# Altium PCB PCB1.PcbDoc
Units mm, origin at the board's own origin, x right, y up, seen from the top; angles counter-clockwise.
Board outline 152.4 x 101.6 mm, 2 copper layers (Top Layer, Bottom Layer); 100 components, 81 nets, 378 pads, 30 vias.
Unrouted connection lines stored in the file: 247.
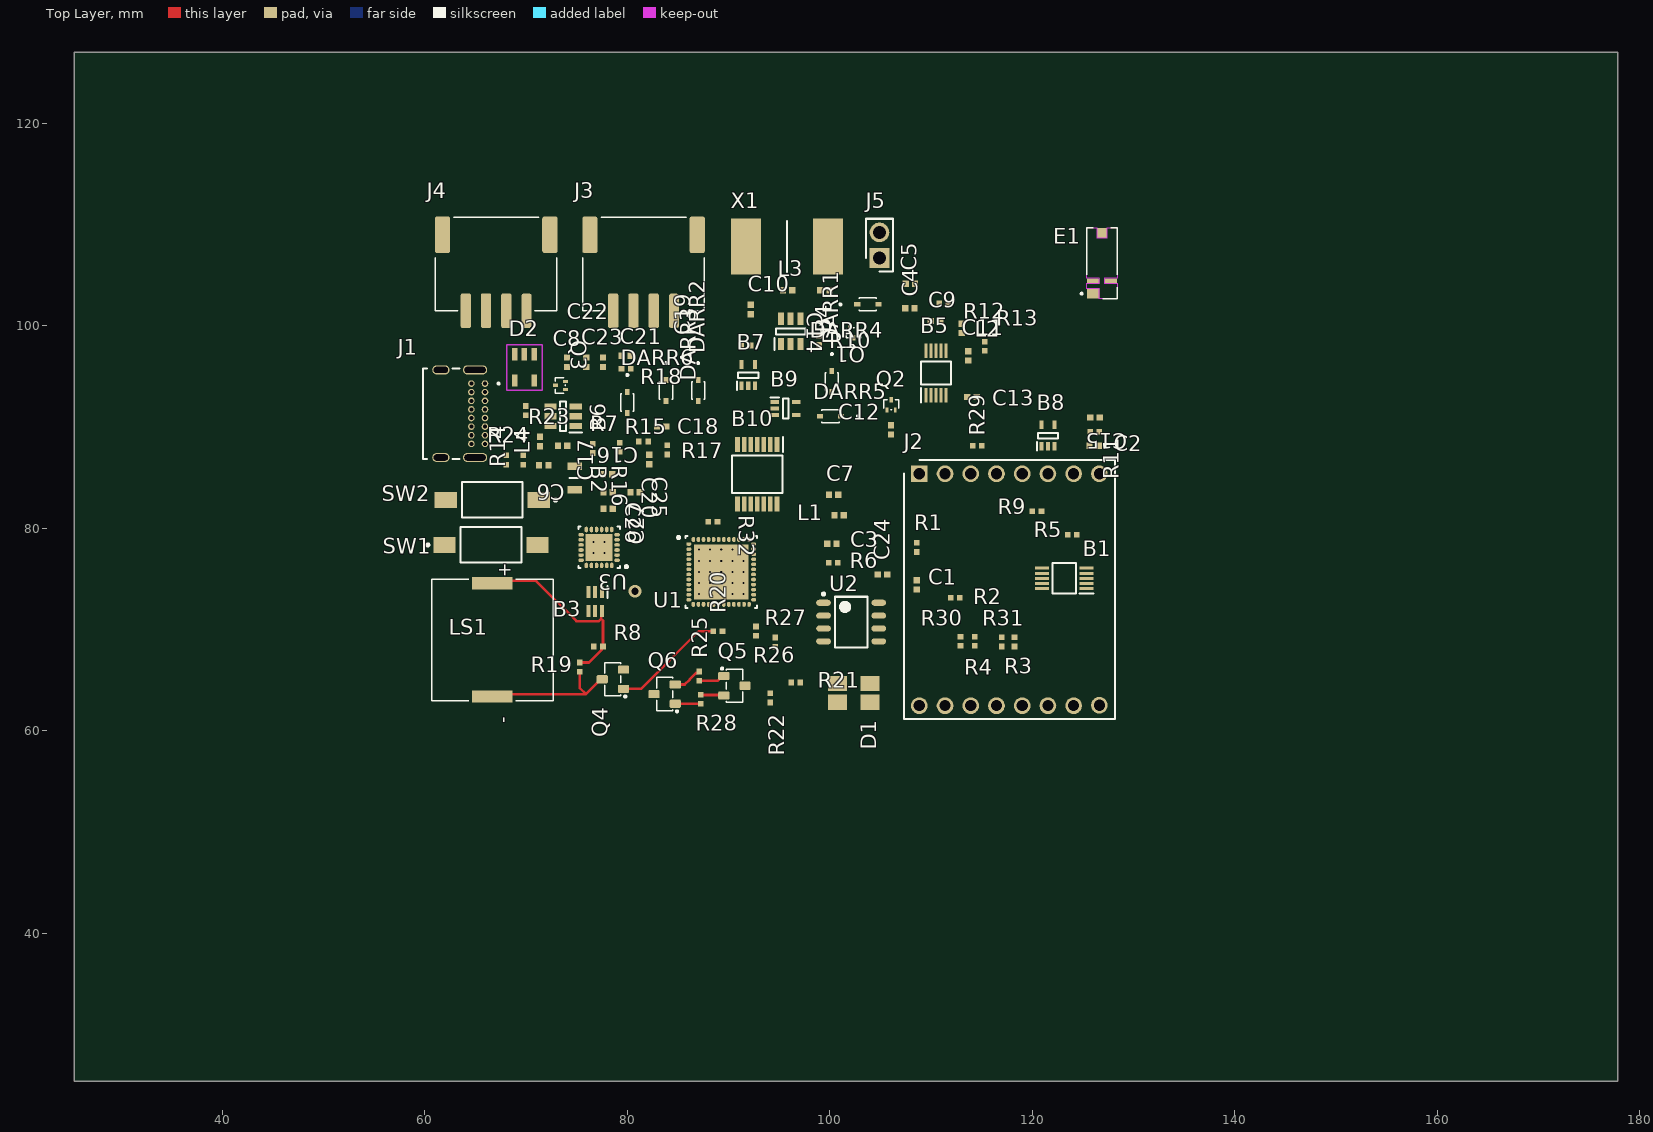
[diagram p0: Top Layer view]
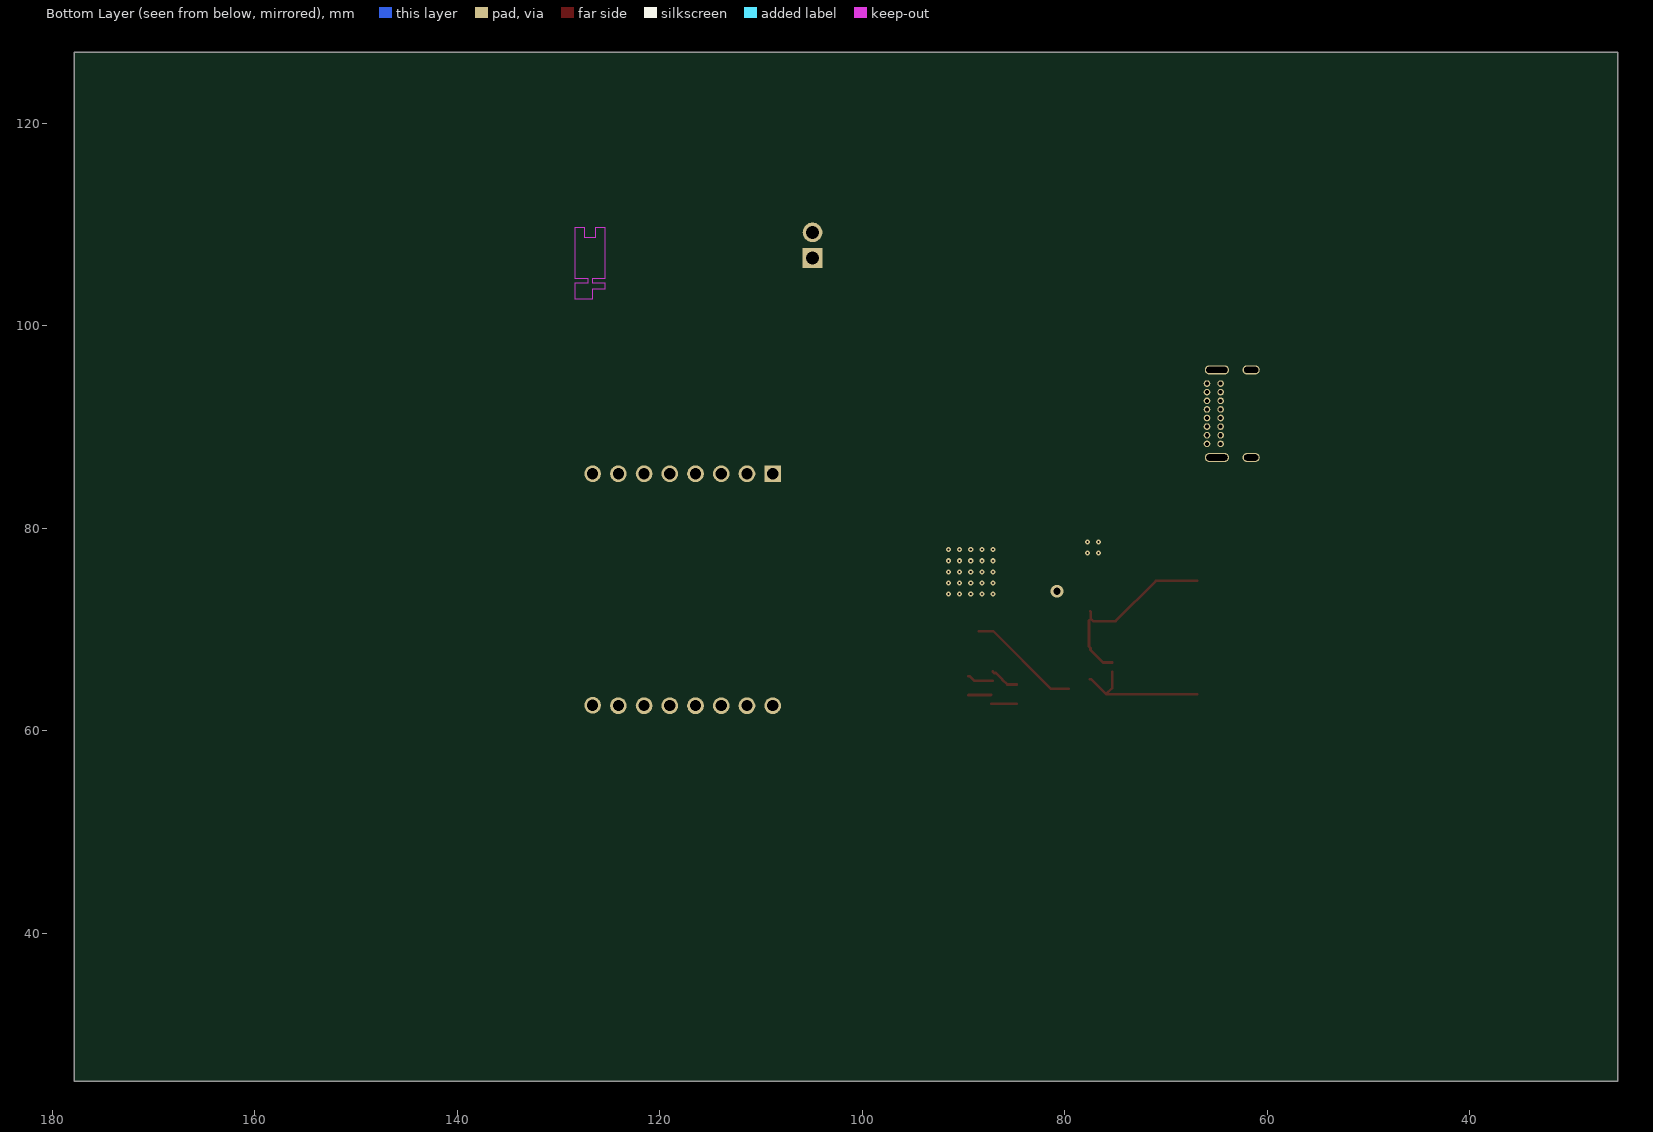
[diagram p1: Bottom Layer view, seen from below]

## Layer stack, top to bottom
Top Solder: solder mask 0.0102, Solder Resist, Dk 3.5
Top Layer: signal copper 0.0356
Dielectric 1: dielectric 0.32, FR-4, Dk 4.8
Bottom Layer: signal copper 0.0356
Bottom Solder: solder mask 0.0102, Solder Resist, Dk 3.5

## Board outline
25.4,25.4 177.8,25.4 177.8,127 25.4,127

## Design rules (kind name [scope] priority, off if disabled: settings)
Clearance [All] p1: gap=0.254 ignorepadtopadclearanceinfootprint=FALSE except(0: Arc-Hole Track-Hole SMDPad-Hole THPad-Hole Via-Hole Fill-Hole Poly-Hole Region-Hole Text-Hole)
PolygonConnect [All] p1: connectstyle=Relief reliefconductorwidth=0.254 reliefentries=4 polygonreliefangle="90 Angle" airgapwidth=0.254
RoutingVias [All] p1: holewidth=0.711 width=1.27 viastyle="Through Hole" minholewidth=0.711 minwidth=1.27 maxholewidth=0.711 maxwidth=1.27
SolderMaskExpansion [All] p1: expansion=0.102 istentingtop=FALSE
SupplyNets "Schematic Supply Nets_11" [InNet('3V3')] p1: voltage=0.000
SupplyNets "Schematic Supply Nets_10" [InNet('HT')] p2: voltage=0.000
SupplyNets "Schematic Supply Nets_9" [InNet('NOT_3V3_BT')] p3: voltage=0.000
SupplyNets "Schematic Supply Nets_8" [InNet('USB')] p4: voltage=0.000
SupplyNets "Schematic Supply Nets_7" [InNet('VDDA')] p5: voltage=0.000
SupplyNets "Schematic Supply Nets_6" [InNet('NOT_3V3_USB')] p6: voltage=0.000
SupplyNets "Schematic Supply Nets_5" [InNet('3V3_Logique')] p7: voltage=0.000
SupplyNets "Schematic Supply Nets_4" [InNet('3V3_BT')] p8: voltage=0.000
SupplyNets "Schematic Supply Nets_3" [InNet('BT')] p9: voltage=0.000
SupplyNets "Schematic Supply Nets_2" [InNet('3V3_HT')] p10: voltage=0.000
SupplyNets "Schematic Supply Nets_1" [InNet('GND')] p11: voltage=0.000
SupplyNets "Schematic Supply Nets" [InNet('3V3_USB')] p12: voltage=0.000
Width [All] p1: maxlimit=0.254 minlimit=0.254 preferedwidth=0.254
30 further rules are at their usual default settings.

## Classes and differential pairs
component class USB: C25 C26 C27 D2 J1 Q5 Q6 R23 R24 R25 R26 R27 R28 U3
component class Logique_Prio_Alim: B7 B8 B9 B10 DARR4 DARR5 DARR6 Q1 Q2 Q3
component class IHM: C21 D1 LS1 Q4 R18 R19 R20 R21 R22 SW1 SW2
component class I2C: B1 C1 C2 J2 J3 J4 J5 R1 R2 R3 R4 R5 R29 R30 R31 X1
component class ESP32_SRAM: C22 C23 C24 R32 U1 U2
component class Converti_Alim: B4 B5 C9 C10 C11 C12 C13 C14 C15 C16 C17 C18 C19 C20 DARR1 DARR2 DARR3 L2 L3 L4 R10 R11 R12 R13 R14 R15 R16 R17
component class Capteurs_et_Antenne: B2 B3 C3 C4 C5 C6 C7 C8 E1 L1 R6 R7 R8 R9

## Components (designator, comment, footprint, x,y, rotation, side; value= is the part's Value field where it differs from the comment)
B1 "INA237AIDGST" SOP50P490X110-10N 123.149,75.057 r180 top
B2 "NB12K00103JBB" RESC2212X50N 74.803,84.963 r270 top
B3 "TMP126DCKR" SOT65P210X110-6N 76.835,72.771 r270 top
B4 "LMR50410Y3FQDBVRQ1" SOT95P280X145-6N 96.139,99.441 r90 top
B5 "TPS62056DGSG4" SOP50P490X110-10N 110.49,95.336 r90 top
B6 "LMR50410Y3FQDBVRQ1" SOT95P280X145-6N 73.66,91.059 r180 top
B7 "MC74VHC1GT08DFT2G" SOT65P210X110-5N 91.948,95.123 r90 top
B8 "MC74VHC1GT08DFT2G" SOT65P210X110-5N 121.539,89.154 r90 top
B9 "MC74VHC1GT08DFT2G" SOT65P210X110-5N 95.631,91.821 r0 top
B10 "74VHC05FT" SOP65P640X120-14N 92.837,85.344 r270 top
C1 "100nF" CAPC1005X06N 108.585,74.422 r270 top
C2 "100nF" CAPC1005X06N 126.111,88.138 r0 top
C3 "8pF" CAPC1005X06N 100.203,78.486 r180 top
C4 "0.6pF" CAPC1005X06N 107.902,101.727 r180 top
C5 "0.9pF" CAPC1005X06N 107.95,104.14 r0 top
C6 "10nF" CAPC1005X06N 71.755,86.233 r180 top
C7 "1pF" CAPC1005X06N 100.378,83.312 r0 top
C8 "0.1µF" CAPC1005X06N 74.041,96.393 r90 top
C9 "10µF" CAPC1005X06N 110.442,100.457 r0 top
C10 "2.2µF" CAPC1005X06N 92.202,101.6 r270 top
C11 "22µF" CAPC1005X06N 113.665,97.028 r90 top
C12 "0.1µF" CAPC1005X06N 106.045,89.71 r90 top
C13 "0.01F" CAPC1005X06N 114.046,92.964 r0 top
C14 "0.01F" CAPC1005X06N 99.52,103.505 r0 top
C15 "10µF" CAPC1005X06N 126.19,90.932 r0 top
C16 "2.2µF" CAPC1005X06N 78.057,85.344 r0 top
C17 "0.1µF" CAPC1005X06N 73.612,88.138 r180 top
C18 "0.01F" CAPC1005X06N 83.391,90.043 r0 top
C19 "10µF" CAPC1005X06N 91.694,98.044 r0 top
C20 "10µF" CAPC1005X06N 82.169,86.789 r270 top
C21 "1µF" CAPC1005X06N 79.883,97.028 r180 top
C22 "10µF" CAPC1005X06N 75.946,96.393 r90 top
C23 "100nF" CAPC1005X06N 77.597,96.393 r90 top
C24 "100nF" CAPC1005X06N 105.204,75.438 r0 top
C25 "100nF" CAPC1005X06N 78.105,83.566 r0 top
C26 "22µF" CAPC1005X06N 78.105,81.915 r0 top
C27 "4.7µF" CAPC1005X06N 80.772,83.566 r0 top
D1 "598-8610-207F" 5988610207F 102.362,63.754 r0 top
D2 "824011" 824011 69.85,95.885 r180 top
DARR1 "SD103AWS-7-F" SD103AWS-7-F 100.203,94.488 r270 top
DARR2 "SD103AWS-7-F" SD103AWS-7-F 86.995,93.599 r270 top
DARR3 "SD103AWS-7-F" SD103AWS-7-F 83.82,93.599 r270 top
DARR4 "SD103AWS-7-F" SD103AWS-7-F 103.759,102.108 r0 top
DARR5 "SD103AWS-7-F" SD103AWS-7-F 100.076,91.059 r180 top
DARR6 "SD103AWS-7-F" SD103AWS-7-F 80.01,92.422 r270 top
E1 "NN03-320" XCVR_NN03-320 126.873,106.172 r270 top
J1 "Use" USB4085-GF-A 61.595,91.313 r270 top
J2 "825433-8" Connect-Mikrobus 108.839,85.384 r0 top
J3 "114020164" 114020164 81.613,105.273 r180 top
J4 "114020164" 114020164 67.056,105.283 r180 top
J5 "61300211121" 61300211121 104.902,106.68 r90 top
L1 "12nH" LQPC1005X06N 103.711,84.074 r0 top
L2 "10µH" LQPC1005X06N 115.824,96.949 r270 top
L3 "3.3µH" LQPC1005X06N 98.631,106.299 r0 top
L4 "3.3µH" LQPC1005X06N 68.58,91.361 r90 top
LS1 "PKLCS1212E40A1-R1" SPKR_PKLCS1212E40A1-R1 66.675,68.973 r270 top
Q1 "SI3139K-TP" SI3139K-TP 102.362,99.314 r180 top
Q2 "SI3139K-TP" SI3139K-TP 106.064,92.194 r0 top
Q3 "SI3139K-TP" SI3139K-TP 73.398,94.107 r90 top
Q4 "SS8050-G" SS8050-G 78.579,65.09 r90 top
Q5 "SS8050-G" SS8050-G 90.585,64.45 r270 top
Q6 "SS8050-G" SS8050-G 83.693,63.627 r90 top
R1 "10Ω" RESC1005X06N 108.585,78.105 r90 top
R2 "10Ω" RESC1005X06N 112.395,73.152 r0 top
R3 "4.7kΩ" RESC1005X06N 118.237,68.776 r270 top
R4 "4.7kΩ" RESC1005X06N 114.3,68.845 r270 top
R5 "10kΩ" RESC1005X06N 123.952,79.375 r180 top
R6 "30Ω" RESC1005X06N 100.33,76.581 r0 top
R7 "10kΩ" RESC1005X06N 76.581,87.884 r270 top
R8 "10kΩ" RESC1005X06N 77.158,68.326 r0 top
R9 "10kΩ" RESC1005X06N 120.454,81.661 r0 top
R10 "51kΩ" RESC1005X06N 98.933,98.552 r270 top
R11 "22.1kΩ" RESC1005X06N 126.169,89.535 r180 top
R12 "1kΩ" RESC1005X06N 111.252,102.235 r0 top
R13 "1kΩ" RESC1005X06N 115.316,97.986 r90 top
R14 "100k" RESC1005X06N 69.977,91.625 r90 top
R15 "51kΩ" RESC1005X06N 81.603,88.567 r180 top
R16 "22.1kΩ" RESC1005X06N 79.248,88.001 r90 top
R17 "1kΩ" RESC1005X06N 83.947,87.736 r90 top
R18 "10kΩ" RESC1005X06N 79.883,95.758 r180 top
R19 "1kΩ" RESC1005X06N 75.311,66.294 r90 top
R20 "1kΩ" RESC1005X06N 88.958,69.85 r180 top
R21 "330Ω" RESC1005X06N 96.647,64.77 r0 top
R22 "330Ω" RESC1005X06N 94.107,63.246 r270 top
R23 "5.1kΩ" RESC1005X06N 69.723,86.741 r90 top
R24 "5.1kΩ" RESC1005X06N 68.072,86.741 r90 top
R25 "12kΩ" RESC1005X06N 87.122,65.405 r90 top
R26 "470Ω" RESC1005X06N 92.71,69.85 r270 top
R27 "470Ω" RESC1005X06N 94.615,68.765 r270 top
R28 "12kΩ" RESC1005X06N 87.249,63.119 r90 top
R29 "100kΩ" RESC1005X06N 114.554,88.138 r0 top
R30 "2kΩ" RESC1005X06N 112.903,68.834 r270 top
R31 "2kΩ" RESC1005X06N 116.967,68.776 r270 top
R32 "0Ω" RESC1005X06N 88.461,80.645 r0 top
SW1 "FSMSM" TECO-FSMSM-2_V 66.548,78.359 r0 top
SW2 "FSMSM" TECO-FSMSM-2_V 66.675,82.804 r180 top
U1 "ESP32-PICO-D4" PQFN50P700X700X104_HS-49N 89.281,75.692 r0 top
U2 "IS66WVS1M8BLL-104NLI" SOIC127P600X175-8N 102.108,70.739 r0 top
U3 "CP2104-F03-GM" PQFN50P400X400X80_HS-25N 77.216,78.105 r180 top
X1 "PSR400ITQFF0L50" RESC10052X200N 95.758,107.823 r180 top

## Footprints (in the part's own frame and the unit in brackets; to place one, negate y for a bottom-side part, rotate by r counter-clockwise, add the part's x,y. Pads: shape width x height; smd on the part's side, far side on the other; paste and mask are expansions set on the pad)
824011 [mil] "Suppresseurs ESD / diodes TVS WE-TVS High Speed 5uA 5VDC 2+1"
  rect 21.65x47.24 smd: 1(-37.4,-51.18) 2(0,-51.18) 3(37.4,-51.18) 4(37.4,51.18) 5(-37.5,51)
  Top Layer keep-out lines w5: 68.9,88.58 68.9,-88.58 -68.9,-88.58 -68.9,88.58 68.9,88.58
  body extent -57,-55 57,55, height 57
114020164 [mm]
  rrect50% 1x3.4 smd: 1(-3,3.8)
  rrect30% 1x3.4 smd: 2(-1,3.8) 3(1,3.8) 4(3,3.8)
  rrect26% 1.5x3.6 smd: MP1(-5.3,-3.7) MP2(5.3,-3.7)
  silkscreen extent -6,-5.45 6,3.8, body extent -6.1,-5.59 5.9,4.59, height 5.2
5988610207F [mm]
  rect 1.9x1.5 smd: 1(-1.6,0.925) 2(1.6,0.925) 3(-1.6,-0.925) 4(1.6,-0.925)
  silkscreen extent -1.65,2 -1.55,2.1, body extent -1.6,-1.35 1.6,1.35, height 0.9
61300211121 [mm] "Embases et logements de câbles WR-PHD 2.54mm 2Pin T HT Header"
  rect 1.95x1.95 / inner round 1.95 / far side rect 1.95x1.95 hole 1.3: 1(0,0)
  round 1.95 hole 1.3: 2(2.54,0)
  silkscreen extent -1.35,-1.35 3.89,1.35
CAPC1005X06N [mm] "Chip Capacitor, 2-Leads, Body 1,00x0,50mm, IPC Medium Density"
  rect 0.62x0.62 smd: 1(-0.46,0) 2(0.46,0)
  body extent -0.53,-0.28 0.53,0.28, height 0.55
Connect-Mikrobus [mm]
  rect 1.65x1.65 / inner round 1.65 / far side rect 1.65x1.65 hole 1.1: 1(0,0)
  round 1.65 hole 1.1: 2(2.54,0) 3(5.08,0) 4(7.62,0) 5(10.16,0) 6(12.7,0) 7(15.24,0) 8(17.78,0) 9(17.78,-22.86) 10(15.24,-22.9) 11(12.7,-22.9) 12(10.16,-22.9) 13(7.62,-22.9) 14(5.08,-22.9) 15(2.54,-22.9) 16(0,-22.9)
  silkscreen extent -1.52,-24.22 19.3,1.37, body extent -1.37,-24.18 19.14,1.28, height 6.7
LQPC1005X06N [mm]
  rect 0.62x0.62 smd: 1(-3.254,-2.794) 2(-2.334,-2.794)
  body extent -3.32,-3.07 -2.27,-2.52, height 0.55
PQFN50P400X400X80_HS-25N [mm] "PQFN, 24-Leads, Body 4,00x4,00mm, Pitch 0,50mm, Thermal Pad 2,65x2,65mm, IPC Medium Density"
  oval 0.55x0.35 smd: 1(-1.775,1.25) 2(-1.775,0.75) 3(-1.775,0.25) 4(-1.775,-0.25) 5(-1.775,-0.75) 6(-1.775,-1.25) 13(1.775,-1.25) 14(1.775,-0.75) 15(1.775,-0.25) 16(1.775,0.25) 17(1.775,0.75) 18(1.775,1.25)
  oval 0.35x0.55 smd: 7(-1.25,-1.775) 8(-0.75,-1.775) 9(-0.25,-1.775) 10(0.25,-1.775) 11(0.75,-1.775) 12(1.25,-1.775) 19(1.25,1.775) 20(0.75,1.775) 21(0.25,1.775) 22(-0.25,1.775) 23(-0.75,1.775) 24(-1.25,1.775)
  rect 2.65x2.65 smd: 25(0,0)
  silkscreen extent -2.83,-2.05 2.05,2.05, body extent -2.05,-2.05 2.05,2.05, height 0.8
PQFN50P700X700X104_HS-49N [mm] "PQFN, 48-Leads, Body 7,00x7,00mm, Pitch 0,50mm, Thermal Pad 5,40x5,40mm, IPC Medium Density"
  oval 0.5x0.35 smd: 1(-3.2,2.75) 2(-3.2,2.25) 3(-3.2,1.75) 4(-3.2,1.25) 5(-3.2,0.75) 6(-3.2,0.25) 7(-3.2,-0.25) 8(-3.2,-0.75) 9(-3.2,-1.25) 10(-3.2,-1.75) 11(-3.2,-2.25) 12(-3.2,-2.75) 25(3.2,-2.75) 26(3.2,-2.25) 27(3.2,-1.75) 28(3.2,-1.25) 29(3.2,-0.75) 30(3.2,-0.25) 31(3.2,0.25) 32(3.2,0.75) 33(3.2,1.25) 34(3.2,1.75) 35(3.2,2.25) 36(3.2,2.75)
  oval 0.35x0.5 smd: 13(-2.75,-3.2) 14(-2.25,-3.2) 15(-1.75,-3.2) 16(-1.25,-3.2) 17(-0.75,-3.2) 18(-0.25,-3.2) 19(0.25,-3.2) 20(0.75,-3.2) 21(1.25,-3.2) 22(1.75,-3.2) 23(2.25,-3.2) 24(2.75,-3.2) 37(2.75,3.2) 38(2.25,3.2) 39(1.75,3.2) 40(1.25,3.2) 41(0.75,3.2) 42(0.25,3.2) 43(-0.25,3.2) 44(-0.75,3.2) 45(-1.25,3.2) 46(-1.75,3.2) 47(-2.25,3.2) 48(-2.75,3.2)
  rect 5.4x5.4 smd: 49(0,0)
  silkscreen extent -4.32,-3.55 3.55,3.55, body extent -3.55,-3.55 3.55,3.55, height 1.04
RESC1005X06N [mm] "Chip Resistor, 2-Leads, Body 1,00x0,50mm, IPC Medium Density"
  rect 0.55x0.55 smd: 1(-0.45,0) 2(0.45,0)
  body extent -0.53,-0.28 0.53,0.28, height 0.55
RESC2212X50N [mm]
  rect 0.75x1.45 smd: 1(-1.15,0) 2(1.15,0)
  silkscreen extent 0,-0.53 0,0.53, body extent -1.07,-0.63 1.07,0.63, height 0.5
RESC10052X200N [mm]
  rect 2.95x5.5 smd: 1(-4.05,0) 2(4.05,0)
  silkscreen extent 0,-2.5 0,2.5, body extent -5,-2.6 5,2.6, height 2
SD103AWS-7-F [mm]
  rect 0.6x0.46 smd: 1(-1.05,0) 2(1.05,0)
  silkscreen extent -2.81,-0.65 0.85,0.65, body extent -1.25,-0.65 1.25,0.65, height 1.2
SI3139K-TP [mm] "MOSFET P-Channel MOSFET"
  rect 0.28x0.5 smd paste+0 mask+0.075: 1(-0.4,-0.5) 2(0.4,-0.5)
  rect 0.36x0.5 smd paste+0 mask+0.075: 3(0,0.5)
  silkscreen extent -0.75,-0.5 0.75,0.5, body extent -0.6,-0.6 0.6,0.6, height 0.55
SOIC127P600X175-8N [mm] "SOIC, 8-Leads, Body 4,90x3,90mm, Pitch 1,27mm, IPC Medium Density"
  oval 1.45x0.6 smd: 1(-2.725,1.905) 2(-2.725,0.635) 3(-2.725,-0.635) 4(-2.725,-1.905) 5(2.725,-1.905) 6(2.725,-0.635) 7(2.725,0.635) 8(2.725,1.905)
  silkscreen extent -2.85,-2.5 1.6,2.88, body extent -3,-2.5 3,2.5, height 1.75
SOP50P490X110-10N [mm]
  rect 1.4x0.3 smd: 1(-2.2,1) 2(-2.2,0.5) 3(-2.2,0) 4(-2.2,-0.5) 5(-2.2,-1) 6(2.2,-1) 7(2.2,-0.5) 8(2.2,0) 9(2.2,0.5) 10(2.2,1)
  silkscreen extent -2.9,-1.5 1.15,1.5, body extent -2.46,-1.5 2.46,1.5, height 1.06
SOP65P640X120-14N [mm]
  rect 1.475x0.45 smd: 1(-2.938,1.95) 2(-2.938,1.3) 3(-2.938,0.65) 4(-2.938,0) 5(-2.938,-0.65) 6(-2.938,-1.3) 7(-2.938,-1.95) 8(2.938,-1.95) 9(2.938,-1.3) 10(2.938,-0.65) 11(2.938,0) 12(2.938,0.65) 13(2.938,1.3) 14(2.938,1.95)
  silkscreen extent -3.67,-2.5 1.85,2.52, body extent -3.1,-2.75 3.3,2.75, height 1.1
SOT65P210X110-5N [mm]
  rect 0.85x0.4 smd: 1(-1.05,0.65) 2(-1.05,0) 3(-1.05,-0.65) 4(1.05,-0.65) 5(1.05,0.65)
  silkscreen extent -1.48,-1 0.28,1.1, body extent -0.95,-1 1.15,1, height 1.1
SOT65P210X110-6N [mm]
  rect 1.2x0.4 smd: 1(-0.95,0.65) 2(-0.95,0) 3(-0.95,-0.65) 4(0.95,-0.65) 5(0.95,0) 6(0.95,0.65)
  silkscreen extent -1.55,1.2 -0.35,1.2, body extent -1.05,-1 1.05,1, height 1
SOT95P280X145-6N [mm]
  rect 1.2x0.6 smd: 1(-1.25,0.95) 2(-1.25,0) 3(-1.25,-0.95) 4(1.25,-0.95) 5(1.25,0) 6(1.25,0.95)
  silkscreen extent -1.85,-1.45 0.3,1.6, body extent -1.4,-1.45 1.4,1.45, height 1.2
SPKR_PKLCS1212E40A1-R1 [mm]
  rect 1.2x4 smd: N(5.6,0) P(-5.6,0)
  silkscreen extent -6,-6 6,6, body extent -6,-6 6,6, height 3
SS8050-G [mm]
  rrect25% 0.8x1.1 smd paste+0 mask+0.075: 1(-0.95,-1.05) 2(0.95,-1.05) 3(0,1.05)
  silkscreen extent -1.77,-1.3 1.65,0.8, body extent -1.5,-1.3 1.5,1.3, height 1.1
TECO-FSMSM-2_V [mm] "SMD, 2-Leads, Body 6x3.5mm, Pitch 9.19mm"
  rect 2.2x1.6 smd: 1(-4.595,0)
  rect 2.18x1.6 smd: 2(4.595,0)
  silkscreen extent -6.37,-1.75 3,1.75, body extent -4.98,-1.75 4.98,1.75, height 4.4
USB4085-GF-A [mm]
  round 0.65 hole 0.4: A1(-2.975,4.36) A4(-2.125,4.36) A5(-1.275,4.36) A6(-0.425,4.36) A7(0.425,4.36) A8(1.275,4.36) A9(2.125,4.36) A12(2.975,4.36) B1(2.975,3.01) B4(2.125,3.01) B5(1.275,3.01) B6(0.425,3.01) B7(-0.425,3.01) B8(-1.275,3.01) B9(-2.125,3.01) B12(-2.975,3.01)
  oval 0.9x1.7 hole 0.6 slot 1.4 at 90 deg: S1(-4.325,0) S2(4.325,0)
  oval 0.9x2.4 hole 0.6 slot 2.1 at 90 deg: S3(-4.325,3.38) S4(4.325,3.38)
  silkscreen extent -4.47,-1.74 4.47,5.8, body extent -4.47,-4.25 4.47,4.92, height 3.46
XCVR_NN03-320 [mm]
  rect 1x1 smd: 1(-3,0)
  rect 0.5x1.25 smd: 2(1.75,-0.875) 4(1.75,0.875)
  rect 1x1.25 smd: 3(3,-0.875)
  Keep-Out Layer region: 3.5,-0.25 2.5,-0.25 2.5,-1.5 2,-1.5 2,-0.25 1.5,-0.25 1.5,-1.5 -3.5,-1.5 -3.5,-0.5 -2.5,-0.5 -2.5,0.5 -3.5,0.5 -3.5,1.5 1.5,1.5 1.5,0.25 2,0.25 2,1.5 3.5,1.5
  silkscreen extent -3.5,-2.1 3.5,1.5, body extent -3.5,-1.5 3.5,1.5, height 2.02

## Part data
B1: "Current Sense Amplifiers 85-V, 16-bit, I2C output current/voltage/power monitor with alert 10-VSSOP -40 to 125", Manufacturer_Name="Texas Instruments", Mouser Part Number=595-INA237AIDGST, Manufacturer_Part_Number=INA237AIDGST
B2: "CTN Capteur - NTC SMD Thermistor, NB12K, 10K, 5% AVX 10k 0805 Protection NTC Thermistor, 5s, 2 x 1.25 x 1.3mm", Manufacturer_Name="Kyocera AVX", Mouser Part Number=581-NB12K00103JBB, Arrow Part Number=NB12K00103JBB, Arrow Price/Stock=https://www.arrow.com/en/products/nb12k00103jbb/avx, Datasheet Link=https://datasheet.datasheetarchive.com/originals/distributors/Datasheets-DGA6/551314.pdf, Geometry.Height=0.5mm, Manufacturer_Part_Number=NB12K00103JBB, Mouser Price/Stock=https://www.mouser.co.uk/ProductDetail/AVX/NB12K00103JBB/?qs=4%252B6%252BTdINQeDPvI%252BQUQjJ3Q%3D%3D
B3: "Board Mount Temperature Sensors +/-0.25 C SPI temperature sensor with 175 C operation, CRC and slew-rate alert", Manufacturer_Name="Texas Instruments", Mouser Part Number=595-TMP126DCKR, Manufacturer_Part_Number=TMP126DCKR
B4 B6: "Régulateurs de tension de commutation Automotive qualified SIMPLE SWITCHER 4-V to 36-V, 1-A synchronous step-down converter 6-SOT-23 -40 to 150", Manufacturer_Name="Texas Instruments", Mouser Part Number=595-R50410Y3FQDBVRQ1, Manufacturer_Part_Number=LMR50410Y3FQDBVRQ1
B5: "TEXAS INSTRUMENTS - TPS62056DGSG4 - Synchronous Buck (Step Down) Switching Regulator, Fixed, 2.7V-10Vin, 3.3V/0.8A out, 850kHz, VSSOP-10", Manufacturer_Name="Texas Instruments", Mouser Part Number=595-TPS62056DGSG4, Manufacturer_Part_Number=TPS62056DGSG4
B7 B8 B9: "Single 2-Input AND Gate, TTL Level", Manufacturer_Name=onsemi, Manufacturer_Part_Number=MC74VHC1GT08DFT2G
B10: "Logic Gates CMOS LOGIC IC INVERTER", Manufacturer_Name=Toshiba, Mouser Part Number=757-74VHC05FT, Manufacturer_Part_Number=74VHC05FT
C1 C2 C3 C4 C5 C6 C7 C8 C9 C10 C11 C12 C13 C14 C15 C16 C17 C18 C19 C20 C21 C22 C23 C24 C25 C26 C27: library part Capacitor
D1: "Standard LEDs - SMD Red/Green WC 80/50mcd 645/570nm", Manufacturer_Name=Dialight, Mouser Part Number=645-598-8610-207F, Arrow Part Number=598-8610-207F, Arrow Price/Stock=https://www.arrow.com/en/products/598-8610-207f/dialight?region=nac, Datasheet Link=https://media.digikey.com/pdf/Data%20Sheets/Dialight%20PDFs/598%20Series%201210%20Pkg%20Bi-Color.pdf, Geometry.Height=0.8mm, Manufacturer_Part_Number=598-8610-207F, Mouser Price/Stock=https://www.mouser.co.uk/ProductDetail/Dialight/598-8610-207F?qs=7JStj%2FjQ2SFuCjosqwklHQ%3D%3D
D2: "TVS Diode Array WE-TVS, High Speed Series  - Low capazity - No leakage current - Low clamping voltage - high ESD voltage protection  -- USB 1.0 - 2.0"
DARR1 DARR2 DARR3 DARR4 DARR5 DARR6: "Diode Array 3 Independent Schottky 40V 175mA Surface Mount 6-TSSOP, SC-88, SOT-363"
E1: "Dual port antenna booster for GNSS, Bluetooth, 5G and UWB (1561 - 1606MHz, 2400 - 2500MHz, 3400 - 3800MHz, 3100 - 4800MHz and 6000 - 10600 MHz), signal booster", Manufacturer_Name=Ignion, Mouser Part Number=128-NN03-320, Manufacturer_Part_Number=NN03-320
J1: library part USB4085-GF-A, "Connecteurs USB USB Type C, 2.0, Rec, TH , G/F, RA , Top Mnt, T & R"
J2: library part Connect-Mikrobus, "Headers & Wire Housings 8P double for connection mikrobus", Manufacturer_Name="TE Connectivity", Mouser Part Number=571-825433-8, Manufacturer_Part_Number=825433-8
J3 J4: "Seeed Studio Accessories Grove Female Header - SMD-4P-2.0mm-90D-20Pcs", Manufacturer_Name="Seeed Studio", Mouser Part Number=713-114020164, Manufacturer_Part_Number=114020164
J5: "WURTH ELEKTRONIK - 61300211121 - HEADER, 2.54MM, PIN, THT, VERTICAL, 2WAY"
L1 L2 L3 L4: library part Bobine
LS1: "Buzzers Transducer, Externally Driven Piezo 1.5V 2kHz 70dB @ 1.5V, 10cm Surface Mount Solder Pads", Package=None, Availability=Unavailable, MF="Murata Electronics", MP=PKLCS1212E40A1-R1, Price=None
Q1 Q2 Q3: "MOSFET P-Channel MOSFET"
Q4 Q5 Q6: "Bipolar Transistors - BJT NPN TRANSISTOR 1.5A 40V"
R1 R2 R3 R4 R5 R6 R7 R8 R9 R10 R11 R12 R13 R14 R15 R16 R17 R18 R19 R20 R21 R22 R23 R24 R25 R26 R27 R28 R29 R30 R31 R32: library part Resistor
SW1 SW2: library part CMP-2000-07511-1, "FSMSM Push Button Switch, 50 mA, -35 to 85 degC, 2-Pin SMD, RoHS, Bulk", Case\/Package=SMD/SMT, Contact Current Rating=50mA, Contact Resistance=100mOhm, Manufacturer="TE Connectivity", Max Operating Temperature=85degC, Max Voltage Rating (DC)=12V, Min Operating Temperature=-35degC, Operating Force=180gf, Package Description="2-Pin Surface Mount Device, Body 6 x 3.5 mm, Pitch 9.19 mm", Package Quantity=1000, Voltage Rating (DC)=24V, Actuator Length=1.07mm, Actuator Material=Polyamide, Contact Material=Brass, Contact Plating=Silver, Current Rating=50mA, Datasheet URL=http://www.te.com/commerce/DocumentDelivery/DDEController?Action=showdoc&DocId=Customer+Drawing%7F1437566-3%7FC2%7Fpdf%7FEnglish%7FENG_CD_1437566-3_C2_1437566_3_1_c.dwg.pdf%7F1437566-3, Datasheet Version="Rev. C2, 08/2014", Electrical Life=20000Cycles, ELV=Compliant, Illumination Type=Illuminated, Lead Free=LeadFree, Manufacturer URL=http://www.te.com/, Mechanical Life=20000Cycles, Mount=SurfaceMount, Mounting Technology=SurfaceMount, Orientation=Straight, Package Reference=FSMSM, Packaging=LoosePiece, REACH SVHC=Unknown, RoHSCompliant=true, Switch Travel=0.25mm, Termination=GullWing, Throw Configuration=SPST
U1: library part ESP32, "Système RF sur puce - SoC SIP module ESP32 with 4MByte Flash, Dual Core MCU, Wi-Fi & Bluetooth Combo, LGA48-pin, 7*7mm", Manufacturer 1="Espressif Systems", Supplier Part Number 1=1904-1029-1-ND, Manufacturer Part Number 1=ESP32-PICO-D4, Supplier 1=Digi-Key
U2: library part SRAM, "SRAM 8Mb, SerialRAM, 2.7V-3.6V, 104MHz, 8 pin SOIC 150 mil, RoHS", Manufacturer 1=ISSI, Supplier Part Number 1=706-IS66WVS1M8BLL-104NLI-ND, Manufactuer Part Number 1=IS66WVS1M8BLL-104NLI, Supplier 1=Digi-Key
U3: library part USBBridge, "USB Bridge, USB to UART USB 2.0 UART Interface 24-QFN (4x4)", Manufacturer 1="Silicon Labs", Manufacturer Part Number 1=CP2104-F03-GM, Supplier 1="Arrow Electronics", Supplier Part Number 1=CP2104-F03-GM
X1: "ROHM - PSR400ITQFF0L50 - SMD Current Sense Resistor, 500 ohm, PSR Series, 3921 [1052 Metric], 4 W, +/- 1%, Metal Strip", Manufacturer_Name="ROHM Semiconductor", Mouser Part Number=755-PSR400ITQFF0L50, Datasheet Link=https://componentsearchengine.com/Datasheets/2/PSR400ITQFF0L50.pdf, Geometry.Height=2mm, Manufacturer_Part_Number=PSR400ITQFF0L50, Mouser Price/Stock=https://www.mouser.co.uk/ProductDetail/ROHM-Semiconductor/PSR400ITQFF0L50?qs=493kPxzlxfLaT1w5Mo%252BtHg%3D%3D

## Via types
v1: diameter 0.5, hole 0.2, Top Layer to Bottom Layer, 29 vias
v2: diameter 1.27, hole 0.711, Top Layer to Bottom Layer, 1 vias

## Nets (pads, with @x,y where several pads share a name; then routed paths per layer and width w, separated by ;. In a path a pad name is that pad's centre, name@x,y a point inside that pad or via, vN(x,y) a via of type N, cw(c..) or ccw(c..) an arc to the next point about the centre after c; other vN are vias at no path point)
3V3: B1.6 B3.6 C2.1 C8.1 C22.1 C23.1 J2.7 J3.3 J4.3 LS1.P Q1.2 Q2.2 Q3.2 R3.1 R4.1 R5.2 R7.1 R8.2 R18.2 R19.2 R29.2 R30.1 R31.1 R32.1 U1.1 U1.3 U1.4 U1.19 U1.37 U1.46 U3.5 U3.6 | length 18.9
  Top Layer w0.254: LS1.P@66.929,74.815 71.01,74.815 74.985,70.84 77.193,70.84 77.416,71.063 ; R19.2 76.215,66.744 77.46,67.989 77.46,68.178 R8.2 77.608,70.871 77.416,71.063 ; B3.6 77.416,71.752 77.416,71.063
3V3_BT: B9.2 B10.3 C13.2 DARR2.2 R12.2
3V3_HT: C14.2 DARR1.2 R13.2
3V3_Logique: B7.5 B8.5 B9.5 C19.1 DARR1.1 DARR2.1 DARR3.1
3V3_USB: B10.5 C18.2 DARR3.2 DARR6.2 R17.2
BT: B5.1 B5.8 C9.1 Q2.3
GND: B1.1 B1.2 B1.7 B2.2 B3.2 B4.2 B5.2 B5.3 B5.4 B5.6 B5.7 B5.10 B6.2 B7.3 B8.3 B9.3 B10.7 C2.2 C3.2 C6.2 C7.1 C8.2 C9.2 C10.2 C11.2 C15.2 C16.2 C19.2 C20.2 C21.2 C22.2 C23.2 C24.2 C25.2 C26.2 C27.2 D1.2 D1.4 D2.2 E1.2 J1.A1 J1.A12 J1.B1 J1.B12 J1.S1 J1.S2 J1.S3 J1.S4 J2.8 J2.16 J3.4 J4.4 J5.2 Q4.2 R11.1 R12.1 R13.1 R16.1 R17.1 R23.1 R24.1 SW1.1 SW2.2 U1.49 U2.4 U3.2 U3.25
  other v1: 87.081,73.492 88.181,73.492 89.281,73.492 90.381,73.492 91.481,73.492 87.081,74.592 88.181,74.592 89.281,74.592 90.381,74.592 91.481,74.592 87.081,75.692 88.181,75.692 89.281,75.692 90.381,75.692 91.481,75.692 87.081,76.792 88.181,76.792 89.281,76.792 90.381,76.792 91.481,76.792 76.666,77.555 77.766,77.555 87.081,77.892 88.181,77.892 89.281,77.892 90.381,77.892 91.481,77.892 76.666,78.655 77.766,78.655
  other v2: 80.772,73.787
HT: B1.8 B4.4 B4.5 B8.1 C10.1 Q1.3 R1.2 X1.2
NetB1_3: B1.3 R5.1 U1.25
NetB1_4: B1.4 J2.14 J3.2 J4.2 R4.2 R30.2 U1.42
NetB1_5: B1.5 J2.13 J3.1 J4.1 R3.2 R31.2 U1.39
NetB1_9: B1.9 C1.2 R2.1
NetB1_10: B1.10 C1.1 R1.1
NetB2_1: B2.1 C6.1 R7.2 U1.10
NetB3_1: B3.1 U1.34
NetB3_3: B3.3 J2.6 R9.2 U1.36
NetB3_4: B3.4 U1.18
NetB3_5: B3.5 R8.1 U1.14
NetB4_1: B4.1 C12.1
NetB4_3: B4.3 R10.2 R11.2
NetB4_6: B4.6 C12.2 L3.1
NetB5_5: B5.5 C11.1 C13.1 L2.2
NetB5_9: B5.9 L2.1
NetB6_1: B6.1 C17.1
NetB6_3: B6.3 R15.2 R16.2
NetB6_4: B6.4 R14.2
NetB6_6: B6.6 C17.2 L4.1
NetB7_4: B7.4 B8.2
NetB8_4: B8.4 DARR4.2
NetB9_4: B9.4 DARR5.2
NetC3_1: C3.1 L1.1 R6.2
NetC4_1: C4.1 C5.1
NetC4_2: C4.2 C7.2 L1.2 U1.2
NetC5_2: C5.2 E1.3
NetC14_1: C14.1 C15.1 L3.2 R10.1
NetC18_1: C18.1 C20.1 L4.2 R15.1
NetC21_1: C21.1 R18.1
NetC24_1: C24.1 U1.26 U2.8
NetC27_1: C27.1 U3.16
NetD1_1: D1.1 R21.2
NetD1_3: D1.3 R22.2
NetD2_3: D2.3 J1.A6 J1.B6 U3.3
NetD2_4: D2.4 J1.A7 J1.B7 U3.4
NetDARR4_1: DARR4.1 Q1.1
NetDARR5_1: DARR5.1 Q2.1
NetDARR6_1: DARR6.1 Q3.1
NetJ1_A5: J1.A5 R23.2
NetJ1_B5: J1.B5 R24.2
NetJ2_1: J2.1 U1.15
NetJ2_2: J2.2 Q6.3 SW1.2 U1.9
NetJ2_3: J2.3 R29.1 U1.35
NetJ2_4: J2.4 U1.12
NetJ2_5: J2.5 R9.1 U1.38
NetJ2_9: J2.9 U1.21
NetJ2_10: J2.10 U1.17
NetJ2_11: J2.11 R26.1 U1.40
NetJ2_12: J2.12 R27.1 U1.41
NetJ5_1: J5.1 R2.2 X1.1
NetLS1_N: LS1.N Q4.3 R19.1 | length 13.7
  Top Layer w0.254: LS1.N@66.929,63.615 75.904,63.615 ; R19.1 75.311,64.208 75.904,63.615 ; Q4.3 77.379,65.09 75.904,63.615
NetQ4_1: Q4.1 R20.2 | length 11.2
  Top Layer w0.254: Q4.1 81.351,64.14 87.061,69.85 R20.2
NetQ5_1: Q5.1 R25.1 | length 2.6
  Top Layer w0.254: R25.1 88.94,64.955 89.385,65.4 Q5.1
NetQ5_2: Q5.2 R28.2 U3.23 | length 2.3
  Top Layer w0.254: R28.2 87.284,63.535 89.5,63.535 Q5.2
NetQ5_3: Q5.3 SW2.1 U1.23
NetQ6_1: Q6.1 R28.1 | length 2.5
  Top Layer w0.254: Q6.1 84.747,62.673 87.245,62.673 R28.1
NetQ6_2: Q6.2 R25.2 U3.19 | length 2.9
  Top Layer w0.254: Q6.2 85.674,64.577 86.182,65.085 86.182,65.103 86.785,65.707 86.974,65.707 R25.2
NetR6_1: R6.1 U1.16
NetR20_1: R20.1 U1.20
NetR21_1: R21.1 U1.22
NetR22_1: R22.1 U1.24
NetR26_2: R26.2 U3.21
NetR27_2: R27.2 U3.20
NetU1_27: U1.27 U2.2
NetU1_29: U1.29 U2.1
NetU1_30: U1.30 U2.7
NetU1_31: U1.31 U2.6
NetU1_32: U1.32 U2.3
NetU1_33: U1.33 U2.5
NOT_3V3_BT: B7.2 B10.4
NOT_3V3_USB: B7.1 B9.1 B10.6
USB: B6.5 C16.1 C25.1 C26.1 D2.5 J1.A4 J1.A9 J1.B4 J1.B9 J2.15 Q3.3 R14.1 U3.7 U3.8
VDDA: R32.2 U1.43
pads on no net: B10.1 B10.2 B10.8 B10.9 B10.10 B10.11 B10.12 B10.13 B10.14 D2.1 E1.1 E1.4 J1.A8 J1.B8 J3.MP1 J3.MP2 J4.MP1 J4.MP2 U1.5 U1.6 U1.7 U1.8 U1.11 U1.13 U1.28 U1.44 U1.45 U1.47 U1.48 U3.1 U3.9 U3.10 U3.11 U3.12 U3.13 U3.14 U3.15 U3.17 U3.18 U3.22 U3.24

## Silkscreen, mask and mechanical layers (free items; w line width, h text height)
Mechanical 1:
  rectangle: 59.667,60.871 129.667,110.871

## Text inside footprints (layer, text, board x,y; h text height)
J1: Mechanical 13 "PCB EDGE" at 60.025,85.998 h0.81 r270
LS1: Top Overlay "-" at 67.375,61.373 h1.27 r270; Top Overlay "+" at 67.375,76.573 h1.27 r270; Mechanical 13 "-" at 67.375,61.373 h1.27 r270; Mechanical 13 "+" at 67.375,76.573 h1.27 r270
Q1: Mechanical 9 "SOT-723" at 104.028,99.564 h0.5 r180
Q2: Mechanical 9 "SOT-723" at 104.398,91.944 h0.5
Q3: Mechanical 9 "SOT-723" at 73.148,95.773 h0.5 r270
Q4: Mechanical 9 "SOT-23" at 78.829,63.674 h0.5 r90
Q5: Mechanical 9 "SOT-23" at 90.335,65.866 h0.5 r270
Q6: Mechanical 9 "SOT-23" at 83.943,62.211 h0.5 r90